# Altium PCB Copy of w43TrafficLight_PCB.PcbDoc
Units mil, origin at the board's own origin, x right, y up, seen from the top; angles counter-clockwise.
Board outline 5960 x 2070 mil, 2 copper layers (Top Layer, Bottom Layer); 41 components, 58 nets, 219 pads, 0 vias.
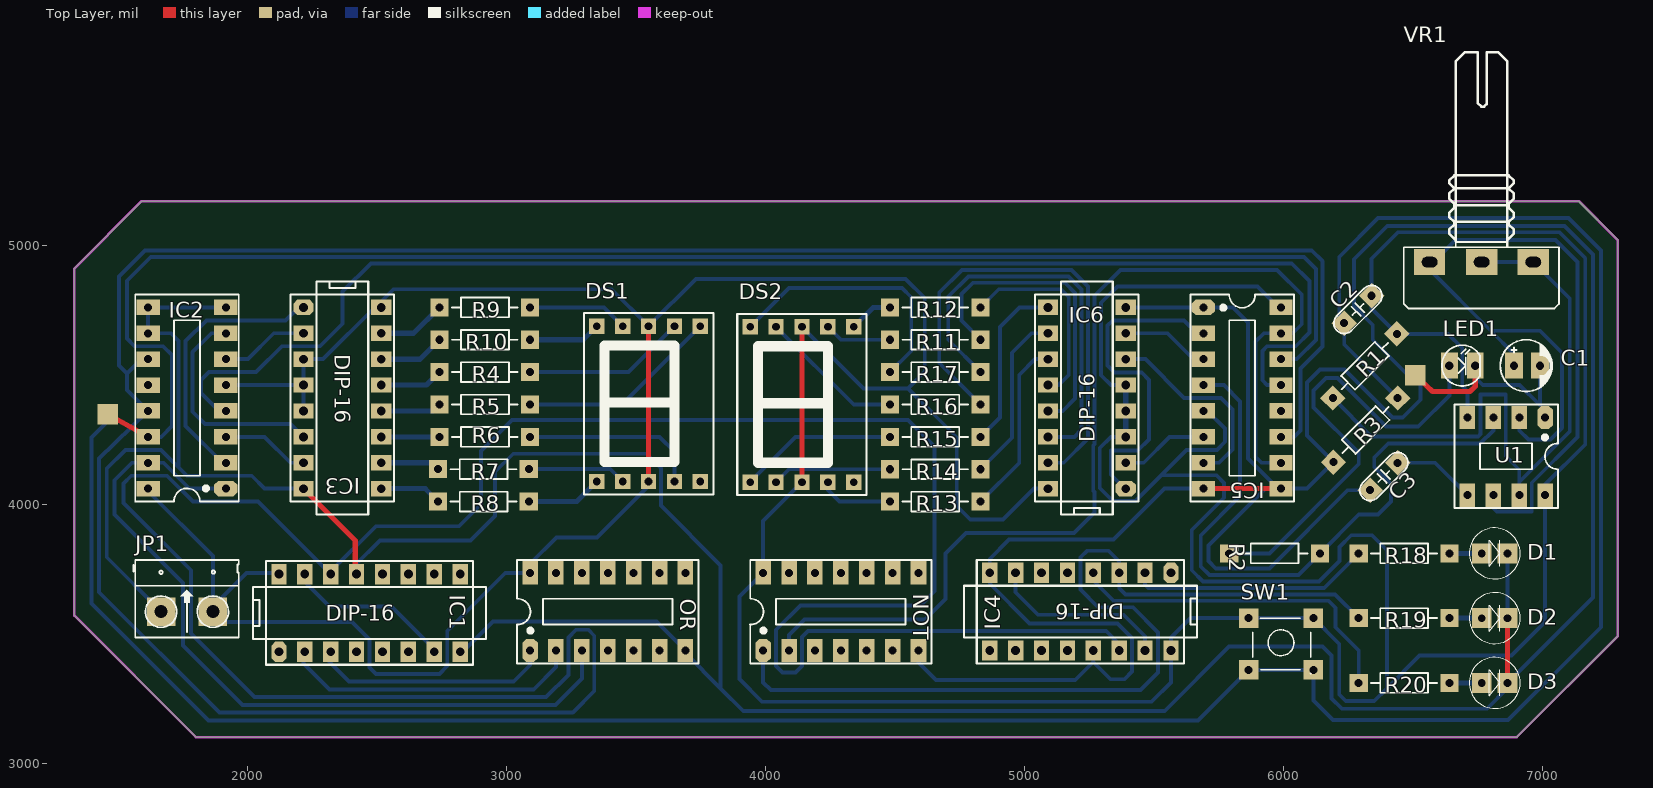
[diagram p0: Top Layer view]
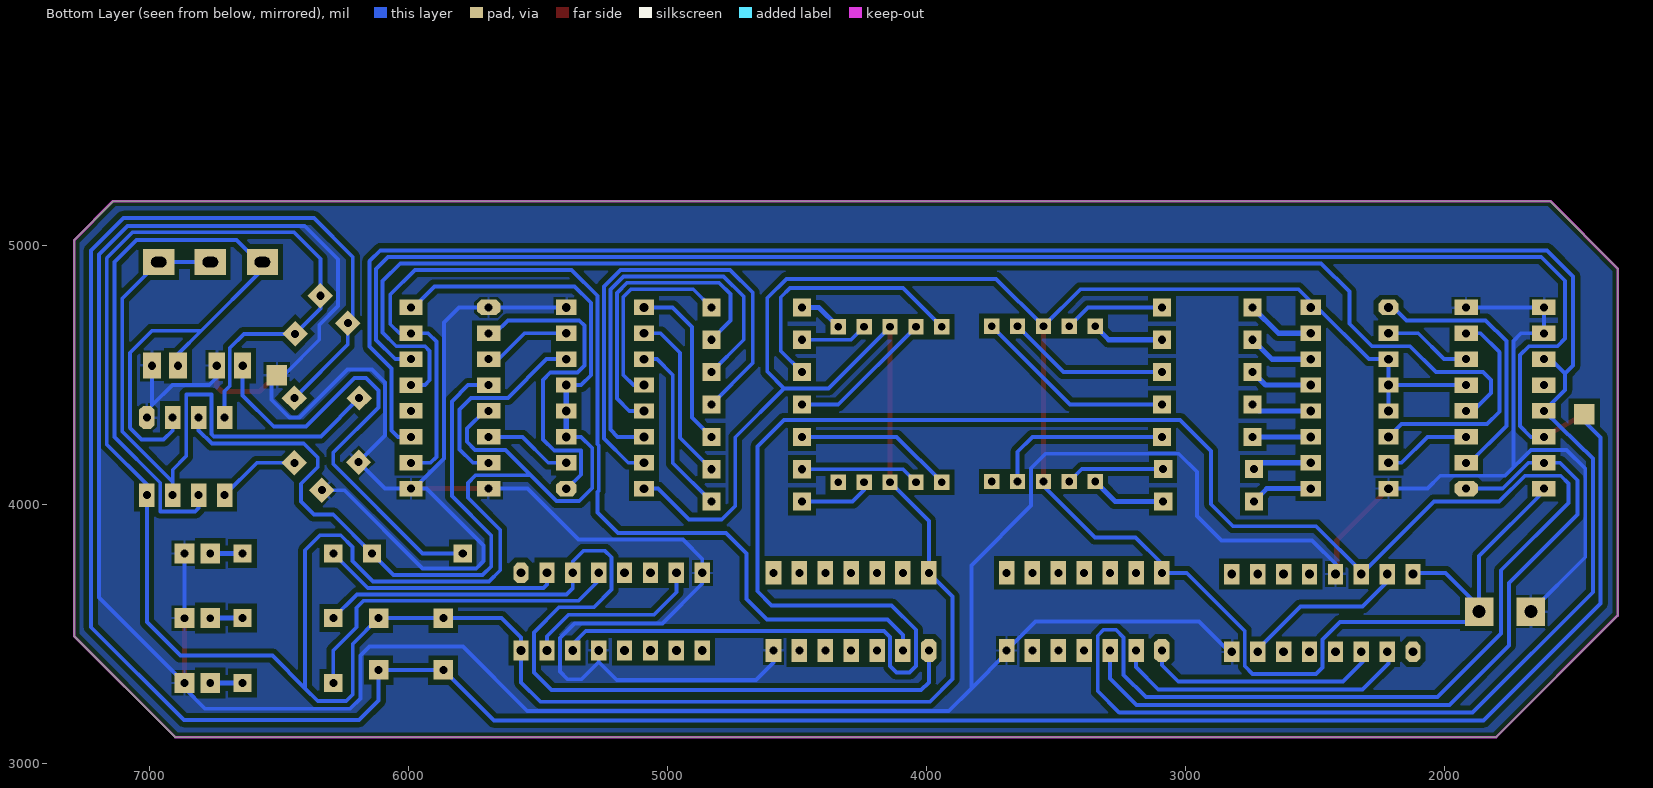
[diagram p1: Bottom Layer view, seen from below]

## Layer stack, top to bottom
Top Solder: solder mask 0.4, Solder Resist, Dk 3.5
Top Layer: signal copper 1.4
Dielectric 1: dielectric 12.6, FR-4, Dk 4.8
Bottom Layer: signal copper 1.4
Bottom Solder: solder mask 0.4, Solder Resist, Dk 3.5

## Board outline
1800,3100 1330,3570 1330,4910 1590,5170 7140,5170 7290,5020 7290,3490 6900,3100

## Design rules (kind name [scope] priority, off if disabled: settings)
Clearance [All] p1: gap=10 ignorepadtopadclearanceinfootprint=FALSE except(0: Arc-Hole Track-Hole SMDPad-Hole THPad-Hole Via-Hole Fill-Hole Poly-Hole Region-Hole Text-Hole)
PolygonConnect [All] p1: connectstyle=Relief reliefconductorwidth=10 reliefentries=4 polygonreliefangle="90 Angle" airgapwidth=10
RoutingVias [All] p1: holewidth=28 width=50 viastyle="Through Hole" minholewidth=28 minwidth=50 maxholewidth=28 maxwidth=50
SolderMaskExpansion [All] p1: expansion=4
Width [All] p1: maxlimit=30 minlimit=15 preferedwidth=20 toplayer_minwidth=20 bottomlayer_maxwidth=20 bottomlayer_prefwidth=15 minimp=50.000000 maximp=50.000000 favimp=50.000000
30 further rules are at their usual default settings.

## Components (designator, comment, footprint, x,y, rotation, side; value= is the part's Value field where it differs from the comment)
C1 "Cap Pol" CP1/2 6890,4535 r0 top
C2 "104" CN150 6286.97,4751.97 r45 top
C3 "104" CN150 6386.97,4106.97 r45 top
D1 "LED-RED-5MM" LED-5MM-RED 6765,3810 r0 top
D2 "LED-YELLOW-5MM" LED-5MM-YELLOW 6765,3560 r0 top
D3 "LED-GREEN-5MM" LED-5MM-GREEN 6765,3310 r0 top
DS1 "7SEG-A" LED7SEG 3546.5,4387.5 r0 top
DS2 "7SEG-A" LED7SEG 4139,4385 r0 top
IC1 "4017" DIP16 2470.29,3580.08 r0 top
IC2 "74193" DIP16/W0.3 1915,4060 r90 top
IC3 "7447" DIP16 2365.08,4409.71 r270 top
IC4 "4017" DIP16 5214.71,3584.92 r180 top
IC5 "74193" DIP16/W0.3 5690,4760 r270 top
IC6 "7447" DIP16 5239.92,4410.29 r90 top
JP1 "Header 2_1" HED2 1665,3585 r0 top
LED1 "LED" LED-3MM-WHITE 6640,4535 r0 top
NOT "7404" DIP14/W0.3 3990,3435 r0 top
OR "7432" DIP14/W0.3 3090,3435 r0 top
R1 "1k" R1/4W 6190,4410 r45 top
R2 "1k" R1/4W 5790,3810 r0 top
R3 "1k" R1/4W 6192.51,4162.51 r45 top
R4 "1k" R1/4W 2740,4510 r0 top
R5 "1k" R1/4W 2740,4385 r0 top
R6 "1k" R1/4W 2740,4260 r0 top
R7 "1k" R1/4W 2735.05,4135.24 r0 top
R8 "1k" R1/4W 2735.05,4010.24 r0 top
R9 "1k" R1/4W 2740,4760 r0 top
R10 "1k" R1/4W 2740,4635 r0 top
R11 "1k" R1/4W 4830,4635 r180 top
R12 "1k" R1/4W 4830,4760 r180 top
R13 "1k" R1/4W 4830,4010 r180 top
R14 "1k" R1/4W 4830,4135 r180 top
R15 "1k" R1/4W 4830,4260 r180 top
R16 "1k" R1/4W 4830,4385 r180 top
R17 "1k" R1/4W 4830,4510 r180 top
R18 "1k" R1/4W 6290,3810 r0 top
R19 "1k" R1/4W 6290,3560 r0 top
R20 "1k" R1/4W 6290,3310 r0 top
SW1 "SW" SW4 5865,3560 r0 top
U1 "NE555" DIP8 6865,4185 r180 top
VR1 "50K" VR-S1 6764,4935 r180 top

## Footprints (in the part's own frame and the unit in brackets; to place one, negate y for a bottom-side part, rotate by r counter-clockwise, add the part's x,y. Pads: shape width x height; smd on the part's side, far side on the other; paste and mask are expansions set on the pad)
CN150 [mil]
  rect 70x70 hole 31: 1(-75,0) 2(75,0)
  silkscreen extent -115,-40 115,40, body extent -115,-33 115,33, height 235
CP1/2 [mil] "Tu hoa < 22uF/16>50V"
  rect 70x100 hole 32: 1(0,0) 2(100,0)
  silkscreen extent -53,-100 147,100, body extent -49,-99 149,99, height 287
DIP8 [mil] "DIP, 8-Leads, Row Spacing 7.62mm, Pitch 2.54mm, Body 9.91x6.73mm"
  oct 60x90 hole 31: 1(-145,-150)
  rect 60x90 hole 31: 2(-45,-150) 3(55,-150) 4(155,-150) 5(155,150) 6(55,150) 7(-45,150) 8(-145,150)
  silkscreen extent -195,-200 205,200, body extent -213,-153 213,153, height 177
DIP14/W0.3 [mil] "14PIN, W 300mil, Pin to pin 100mil"
  oct 60x90 hole 31: 1(0,0)
  rect 60x90 hole 31: 2(100,0) 3(200,0) 4(300,0) 5(400,0) 6(500,0) 7(600,0) 8(600,300) 9(500,300) 10(400,300) 11(300,300) 12(200,300) 13(100,300) 14(0,300)
  silkscreen extent -50,-50 650,350, body extent -70,-12 680,302, height 145
DIP16 [mm]
  oct 1.5x2 hole 0.864: 1(-8.897,-3.812)
  rect 1.5x2 hole 0.864: 2(-6.357,-3.812) 3(-3.817,-3.812) 4(-1.277,-3.812) 5(1.263,-3.812) 6(3.803,-3.812) 7(6.343,-3.812) 8(8.883,-3.812) 9(8.883,3.808) 10(6.343,3.808) 11(3.803,3.808) 12(1.263,3.808) 13(-1.277,3.808) 14(-3.817,3.808) 15(-6.357,3.808) 16(-8.897,3.808)
  silkscreen extent -11.44,-5.08 11.42,5.08, body extent -10,-3.93 10,3.94, height 1.99
DIP16/W0.3 [mil] "16 PIN, W 300mil, Pin to pin 100mil"
  oct 60x90 hole 31: 1(0,0)
  rect 60x90 hole 31: 2(100,0) 3(200,0) 4(300,0) 5(400,0) 6(500,0) 7(600,0) 8(700,0) 9(700,300) 10(600,300) 11(500,300) 12(400,300) 13(300,300) 14(200,300) 15(100,300) 16(0,300)
  silkscreen extent -50,-50 750,350, body extent -52,-57 752,356, height 299
HED2 [mil] "Header 2, 2 pin, hight 300mil, Pin to Pin 200, Colour Green"
  rect 110x110 hole 50: 1(0,0) 2(200,0)
  silkscreen extent -106,-100 300,200, body extent -92,-140 302,155, height 394
LED7SEG [mil] "LED7SEG"
  round 60 on Top Overlay: 0(186,-210)
  rect 59.06x59.06 hole 30: 1(-199,-300) 2(-99,-300) 3(1,-300) 4(101,-300) 5(201,-300) 6(201,300) 7(101,300) 8(1,300) 9(-99,300) 10(-199,300)
  silkscreen extent -249,-350 251,350, body extent -250,-375 250,375, height 316
LED-3MM-WHITE [mil] "LED 2 PIN, 3ly Only colour"
  rect 65x100 hole 32: 1(0,0) 2(100,0)
  silkscreen extent -29,-78 118,79, body extent -25,-75 113,75, height 217
LED-5MM-GREEN [mil]
  rect 77x77 hole 30: A(0,0) K(100,0)
  silkscreen extent -48,-98 148,98, body extent -54,-105 155,105, height 370
LED-5MM-RED [mil]
  rect 77x77 hole 30: A(0,0) K(100,0)
  silkscreen extent -48,-98 148,98, body extent -54,-105 155,105, height 370
LED-5MM-YELLOW [mil]
  rect 77x77 hole 30: A(0,0) K(100,0)
  silkscreen extent -48,-98 148,98, body extent -54,-105 155,105, height 370
R1/4W [mil] "R 1/4W, 2 Pin, 350mil"
  rect 70x70 hole 31: 1(0,0) 2(350,0)
  silkscreen extent 48,-38 302,38, body extent -40,-47 386,47, height 111
SW4 [mil] "SW button 4pin, 250 x250 mil"
  rect 75x75 hole 31: 1(0,0) 2(250,-200) 3(250,0) 4(0,-200)
  silkscreen extent 15,-215 240,0, body extent -36,-220 276,24, height 276
VR-S1 [mil]
  rect 120x100 hole 40 slot 60 at 0 deg: 1(-200,0) 2(-1,0) 3(200,0)
  silkscreen extent -299,-810 300,179, body extent -310,-818 310,188, height 839

## Part data
C1: "Polarized Capacitor (Radial)"
C2 C3: library part CN1.5, "Capacitor Ceramic"
DS1 DS2: library part LED7SEG-A, "14.2 mm General Purpose Blue 7-Segment Display: CA, RH DP, Gray Surface"
IC1 IC4: "Decade Counter/Divider with 10 Decoded Outputs"
IC2 IC5: "Synchronous 4-Bit Up/Down Counter"
IC3 IC6: "BCD to 7-Segment Decoder/Driver"
JP1: "Header, 2-Pin"
LED1: "LED Single colour Green and Red"
NOT: "Hex Inverter"
OR: "Quad 2-Input OR Gate"
R1 R2 R3 R4 R5 R6 R7 R8 R9 R10 R11 R12 R13 R14 R15 R16 R17 R18 R19 R20: library part R1/4W, "Resistor 1/4W"
SW1: library part SW4-1, "Switch button 4 pin"
U1: "TIMER IC"
VR1: library part VR-S, "Var Resistor"

## Free pads (board coordinates)
  rect 80x80 all layers, no hole: 2(1459,4347) 3(6508,4498)

## Nets (pads, with @x,y where several pads share a name; then routed paths per layer and width w, separated by ;. In a path a pad name is that pad's centre, name@x,y a point inside that pad or via, vN(x,y) a via of type N, cw(c..) or ccw(c..) an arc to the next point about the centre after c; other vN are vias at no path point)
GND: 
NetC1_1: 
NetC3_2: 
NetD1_A: 
NetD2_A: 
NetD3_A: 
NetDS1_1: 
NetDS1_2: 
NetDS1_4: 
NetDS1_6: 
NetDS1_7: 
NetDS1_9: 
NetDS1_10: 
NetDS2_1: 
NetDS2_2: 
NetDS2_4: 
NetDS2_6: 
NetDS2_7: 
NetDS2_9: 
NetDS2_10: 
NetIC1_2: 
NetIC1_3: 
NetIC1_7: 
NetIC1_14: 
NetIC2_1: 
NetIC2_2: 
NetIC2_3: 
NetIC2_4: 
NetIC2_6: 
NetIC2_7: 
NetIC3_9: 
NetIC3_10: 
NetIC3_11: 
NetIC3_12: 
NetIC3_13: 
NetIC3_14: 
NetIC3_15: 
NetIC4_2: 
NetIC4_3: 
NetIC4_4: 
NetIC4_7: 
NetIC5_2: 
NetIC5_3: 
NetIC5_6: 
NetIC5_7: 
NetIC5_10: 
NetIC6_9: 
NetIC6_10: 
NetIC6_11: 
NetIC6_12: 
NetIC6_13: 
NetIC6_14: 
NetIC6_15: 
NetLED1_1: 
NetR1_1: 
RST: 
VCC: 
ZZZ: 
pads on no net: C1.1 C1.2 C2.1 C2.2 C3.1 C3.2 D1.A D1.K D2.A D2.K D3.A D3.K DS1.0 DS1.1 DS1.2 DS1.3 DS1.4 DS1.5 DS1.6 DS1.7 DS1.8 DS1.9 DS1.10 DS2.0 DS2.1 DS2.2 DS2.3 DS2.4 DS2.5 DS2.6 DS2.7 DS2.8 DS2.9 DS2.10 IC1.1 IC1.2 IC1.3 IC1.4 IC1.5 IC1.6 IC1.7 IC1.8 IC1.9 IC1.10 IC1.11 IC1.12 IC1.13 IC1.14 IC1.15 IC1.16 IC2.1 IC2.2 IC2.3 IC2.4 IC2.5 IC2.6 IC2.7 IC2.8 IC2.9 IC2.10 IC2.11 IC2.12 IC2.13 IC2.14 IC2.15 IC2.16 IC3.1 IC3.2 IC3.3 IC3.4 IC3.5 IC3.6 IC3.7 IC3.8 IC3.9 IC3.10 IC3.11 IC3.12 IC3.13 IC3.14 IC3.15 IC3.16 IC4.1 IC4.2 IC4.3 IC4.4 IC4.5 IC4.6 IC4.7 IC4.8 IC4.9 IC4.10 IC4.11 IC4.12 IC4.13 IC4.14 IC4.15 IC4.16 IC5.1 IC5.2 IC5.3 IC5.4 IC5.5 IC5.6 IC5.7 IC5.8 IC5.9 IC5.10 IC5.11 IC5.12 IC5.13 IC5.14 IC5.15 IC5.16 IC6.1 IC6.2 IC6.3 IC6.4 IC6.5 IC6.6 IC6.7 IC6.8 IC6.9 IC6.10 IC6.11 IC6.12 IC6.13 IC6.14 IC6.15 IC6.16 JP1.1 JP1.2 LED1.1 LED1.2 NOT.1 NOT.2 NOT.3 NOT.4 NOT.5 NOT.6 NOT.7 NOT.8 NOT.9 NOT.10 NOT.11 NOT.12 NOT.13 NOT.14 OR.1 OR.2 OR.3 OR.4 OR.5 OR.6 OR.7 OR.8 OR.9 OR.10 OR.11 OR.12 OR.13 OR.14 R1.1 R1.2 R2.1 R2.2 R3.1 R3.2 R4.1 R4.2 R5.1 R5.2 R6.1 R6.2 R7.1 R7.2 R8.1 R8.2 R9.1 R9.2 R10.1 R10.2 R11.1 R11.2 R12.1 R12.2 R13.1 R13.2 R14.1 R14.2 R15.1 R15.2 R16.1 R16.2 R17.1 R17.2 R18.1 R18.2 R19.1 R19.2 R20.1 R20.2 SW1.1 SW1.2 SW1.3 SW1.4 U1.1 U1.2 U1.3 U1.4 U1.5 U1.6 U1.7 U1.8 VR1.1 VR1.2 VR1.3
copper on no net: | length 131997
  Top Layer w20: 1459,4347 1615,4260 ; 2215,4060 2415,3860 2415,3735 ; 3547.5,4087.5 3547.5,4687.5 ; 4140,4085 4140,4685 ; 5690,4060 5990,4060 ; 6508,4498 6575,4435 6720,4435 6740,4455 6740,4535 ; 6865,3310 6865,3560
  Bottom Layer w15: 1466.5,4327.5 1397,4258 1397,3616 1848,3165 5670,3165 5865,3360 6115,3360 6115,3242 6190,3167 6867,3167 7225,3525 7225,4980 7100,5105 6365,5105 6215,4955 6215,4717.87 6233.93,4698.93 6233.93,4616.07 6440,4410 ; 1586,4368 1594,4360 1615,4360 ; 1615,4060 1615,4050 1865,3800 1865,3605 ; 1615,4260 1665.5,4260 1707,4301.5 1707,4576 1673,4610 1563,4610 1533,4640 1533,4863 1625,4955 6078.17,4955 6125,4908.17 6125,4634.21 6050.79,4560 5990,4560 ; 1615,4560 1590,4560 1534,4504 ; 1665,3585 1455,3795 1455,4138 1527,4210 1665,4210 1765,4110 2015,4110 2065,4060 2215,4060 ; 1733,4143 1733,4630 1703,4660 1615,4660 1615,4760 1915,4760 ; 1915,4060 1774,4060 1674,4160 1615,4160 1552.5,4160 1485,4092.5 1485,3960 1750,3695 1750,3455 1980,3225 3187.5,3225 3290,3327.5 3290,3435 ; 1915,4160 1902.53,4160 1760,4302.53 1760,4630 1840,4710 2145,4710 2195,4760 2215,4760 ; 1915,4260 2065,4260 2165,4160 2215,4160 ; 1915,4360 1888,4360 1819,4429 1819,4479 1850,4510 2032,4510 2132,4610 2279,4610 2366,4697 2366,4821 2475,4930 6031.22,4930 6100,4861.22 6100,4663.17 6046.83,4610 5936.5,4610 5918,4591.5 5918,4478.5 5936.5,4460 5990,4460 ; 1915,4460 2215,4460 ; 1915,4560 2000,4560 2100,4660 2215,4660 ; 1915,4660 1860,4660 1787,4587 1787,4357 1834,4310 2165,4310 2215,4260 ; 2115,3735 1995,3735 1865,3605 ; 2215,3435 2215,3385 2315,3285 3104.25,3285 3190,3370.75 3190,3435 ; 2215,3735 2215,3705 2315,3605 2555,3605 2715,3445 2715,3435 ; 2215,4360 2215,4460 ; 2315,3435 2315,3390.5 2390.5,3315 3027,3315 3090,3378 3090,3435 ; 2315,3745 2320,3740 ; 2325,3735 2320,3740 ; 2415,3735 2415,3765 2510,3860 2860,3860 2955,3955 2955,4125.2 3024.8,4195 3539,4195 3595,4139 3595,3995 3826,3764 3826,3289 ; 2815,3435 2835,3435 2947,3547 3578,3547 3690,3435 3690,3425 3826,3289 ; 3085.05,4135.24 3399.76,4135.24 3447.5,4087.5 ; 3090,4260 3590,4260 3647.5,4202.5 3647.5,4087.5 ; 3090,4385 3445,4385 3747.5,4687.5 ; 3090,4510 3470,4510 3647.5,4687.5 ; 3090,4760 3375,4760 3447.5,4687.5 ; 3547.5,4087.5 3547.5,4070.5 3349,3872 3192,3872 3090,3770 3090,3735 2994,3735 2770,3511 2770,3375 2740,3345 2495,3345 2470.3,3369.7 2470.3,3477.7 2403,3545 1905,3545 1865,3585 1865,3605 ; 3940,4085 4115,4260 4480,4260 ; 3940,4685 4090,4835 4526,4835 4562,4799 4562,4592 4480,4510 ; 3990,3435 3990,3312 4020,3282 5447,3282 5515,3350 5515,3505 5418,3602 5283,3602 5215,3670 5215,3795 5240,3820 5324.5,3820 5365,3779.5 5365,3735 5365,3677 5390,3652 6198,3652 6290,3560 ; 4040,4085 4090,4135 4480,4135 ; 4040,4685 4340,4385 4480,4385 ; 4090,3435 4090,3495 4150,3555 4615,3555 4694.6,3634.6 4694.6,3809.1 4773.63,3888.13 5190.13,3888.13 5270,3968 5270,4046.64 5265,4051.64 5265,4227.36 5270,4232.36 5270,4805 5370,4905 5975,4905 6070,4810 6070,4695 6035,4660 5990,4660 5924,4660 5892,4628 5892,4182 5914,4160 5990,4160 ; 4140,4085 3990,3935 3990,3735 3898,3643 3898,3325 3986,3237 5490,3237 5565,3312 5565,3435 5565,3485 5640,3560 5865,3560 6115,3560 6215,3460 6215,3265 6240,3240 6350,3240 6399,3289 ; 4140,4685 4378,4447 4549,4447 ; 4240,4085 4240,4055 4285,4010 4480,4010 ; 4240,4685 4290,4635 4480,4635 ; 4590,3435 4590,3388 4657,3321 5195.5,3321 5265,3390.5 ; 4830,4010 4979,4159 4979,4499 5040,4560 5090,4560 ; 4830,4135 4951.41,4256.41 4951.41,4585 5026.41,4660 5090,4660 ; 4830,4260 4905,4335 4905,4685 4980,4760 5090,4760 ; 4830,4385 4670,4545 4670,4816.84 4758.16,4905 5181,4905 5245,4841 5245,4254 5151,4160 5090,4160 ; 4830,4510 4705,4635 4705,4802.01 4782.99,4880 5169.65,4880 5220,4829.65 5220,4288 5192,4260 5090,4260 ; 4830,4635 4756,4709 4756,4811 4800,4855 5155,4855 5195,4815 5195,4407.9 5147.1,4360 5090,4360 ; 4830,4760 4900,4830 5140,4830 5170,4800 5170,4499.5 5130.5,4460 5090,4460 ; 4965,3735 4965,3660 5051.94,3573.06 5381.94,3573.06 5465,3490 5465,3435 ; 5090,4060 5035.75,4060 4916,3940.25 4790,3940.25 4737.59,3992.66 4737.59,4258.41 4549,4447 ; 5265,3435 5265,3390.5 ; 5265,3735 5265,3705 5343,3627 6173,3627 6200,3600 6200,3525 6290,3435 6290,3310 ; 5365,3435 5365,3460 5315,3510 4163,3510 4140,3487 4140,3375 4115,3350 4065,3350 4040,3375 4040,3515 4134,3609 4597,3609 4652,3664 4652,4223 4550,4325 3020,4325 2900,4205 2900,4000 2815,3915 2495,3915 2320,3740 ; 5390,4060 5386.73,4060 5333.13,4113.6 5333.13,4207.03 5436.53,4207.03 5480,4250.5 5480,4480 5452,4508 5347.5,4508 5320,4535.5 5320,4690 5340,4710 5615,4710 5665,4660 5690,4660 ; 5390,4160 5460,4160 5560,4260 5690,4260 ; 5390,4260 5333,4260 5290,4217 5290,4062 5340,4012 5427.5,4012 5530,4114.5 ; 5390,4460 5333,4460 5295,4498 5295,4778 5358,4841 5899,4841 5980,4760 5990,4760 ; 5390,4560 5466,4560 5616,4410 5758,4410 5802,4366 5802,4211.5 5750.5,4160 5690,4160 ; 5390,4660 5551,4660 5651,4560 5690,4560 ; 5390,4760 5690,4760 5804,4760 5862,4702 5862,4176.64 5978.64,4060 5990,4060 6090,4060 6192.51,4162.51 6090,4265.02 6090,4470 6140,4520 6235,4520 6420,4335 6460,4335 6528.4,4403.4 6528.4,4477.6 6508,4498 6481,4498 6344,4635 6344,4692 6271.07,4764.93 6271.07,4946.07 6400,5075 7085,5075 7195,4965 7195,3640 6865,3310 ; 5465,3735 5465,3689.5 5477.5,3677 6157,3677 6290,3810 ; 5690,4060 5540,4060 5343,3863 4940,3863 4865,3788 4865,3735 4865,3693 5018,3540 5358,3540 5415,3483 5415,3354 5385,3324 5331.5,3324 5265,3390.5 ; 5690,4360 5705,4360 5773,4292 5773,4241 5742,4210 5625.5,4210 5530,4114.5 ; 5690,4460 5769,4460 5832,4397 5832,4031 5680,3879 5680,3760 5713,3727 6057,3727 6140,3810 6290,3960 6365,3960 6415,4010 6415,4078.93 6350,4143.93 6350,4180 6404,4234 6759,4234 6810,4285 6810,4335 ; 5790,3810 5945,3810 6290,4155 6290,4200 6116,4374 6116,4439 6164,4487 6208,4487 6395,4300 6520,4300 6640,4420 6640,4535 ; 5955,4060 5930,4060 5710,3840 5710,3780 5738,3752 5945,3752 6246.93,4053.93 6333.93,4053.93 ; 5990,4260 6040.5,4260 6065,4284.5 6065,4524.21 6150,4609.21 6150,4938.42 6108.42,4980 1603,4980 1503,4880 1503,4535 1534,4504 ; 6190,4410 6338,4262 6751.64,4262 6760,4270.36 6760,4423 6858,4423 6858,4185 6910,4133 6910,4085 ; 6440,4160 6585,4160 6710,4035 ; 6710,4335 6710,4436 6690,4456 6690,4603 6635.51,4657.49 6437.49,4657.49 6340,4754.98 6340,4805 6340,4948 6442,5050 7065,5050 7165,4950 7165,4231.24 7010,4076.24 7010,4035 7010,3545 6880,3415 6525,3415 6399,3289 ; 6740,4535 6740,4489.78 6768.78,4461 6911,4461 6990,4382 6990,4535 ; 6765,4935 6964,4935 7105,4794 7105,4280 6910,4085 ; 6810,4035 6810,3985 6823,3972 6958,3972 6958,4083 7135,4260 7135,4935 7050,5020 6664,5020 6579,4935 6564,4935 6564,4906 6800,4670 ; 6864.5,3310 6864.5,3289.5 6785,3210 6225,3210 6185,3250 6185,3415 6150,3450 5789,3450 5541,3202 3913,3202 3826,3289 ; 6865,3560 6865,3810 ; 6890,4535 6890,4580 6800,4670 ; 6910,4035 6910,4085 ; 6910,4335 6910,4285 6945,4250 7030,4250 7075,4295 7075,4585 6990,4670 6800,4670 ; 6990,4355 7010,4335 ; 1534,4504 1534,4441 1615,4360 ; 1615,4360 1425,4177 1425,3660 1890,3195 3255,3195 3338,3278 3338,3492 3315,3515 3268,3515 3238,3485 3238,3341 3152,3255 2026,3255 1780,3501 1780,3745 1520,4005 1520,4080 1550,4110 1688,4110 1788,4010 2040,4010 2315,3735 2320,3740 ; 2215,4460 2215,4560 2290,4560 2490,4760 2515,4760 2515,4782 2563,4830 3405,4830 3547.5,4687.5 3730,4870 4540,4870 4614,4796 4614,4512 4549,4447 ; 5530,4114.5 5532.5,4112 5740,4112 5770,4082 5770,4025 5645,3900 5645,3745 5688,3702 6137,3702 6216,3781 6216,3835 6261,3880 6341,3880 6399,3822 6399,3289
  Bottom Layer w20: 2515,4060 2685.29,4060 2735.05,4010.24 ; 2515,4160 2710.29,4160 2735.05,4135.24 ; 2515,4260 2740,4260 ; 2515,4360 2715,4360 2740,4385 ; 2515,4460 2690,4460 2740,4510 ; 2515,4560 2665,4560 2740,4635 ; 2515,4660 2640,4660 2740,4760 ; 3085.05,4010.24 3270.24,4010.24 3347.5,4087.5 ; 3090,4635 3295,4635 3347.5,4687.5 ; 4340,4685 4415,4760 4480,4760 ; 5390,4260 5390,4360 5390,4460 ; 6640,3310 6765,3310 ; 6640,3560 6765,3560 ; 6640,3810 6765,3810

## Polygon pours and split planes (outlines as drawn)
no net on Bottom Layer "NONET_L02_P006" (solid, pour order 6): 6570,5150 7130,5150 7270,5010 7270,4820 7270,3500 6890,3120 6790,3120 1810,3120 1350,3580 1350,3720 1350,4900 1450,5000 1600,5150 6570,5150

## Keep-outs
Keep-Out Layer:
  the board outline again, w10

## Text inside footprints (layer, text, board x,y; h text height)
IC1: Top Overlay "DIP-16" at 2300,3550 h59.05
IC3: Top Overlay "DIP-16" at 2335,4580 h59.05 r270
IC4: Top Overlay "DIP-16" at 5385,3615 h59.05 r180
IC6: Top Overlay "DIP-16" at 5270,4240 h59.05 r90